# EAGLE board cam (EAGLE 9.6.2), part 1 of 2
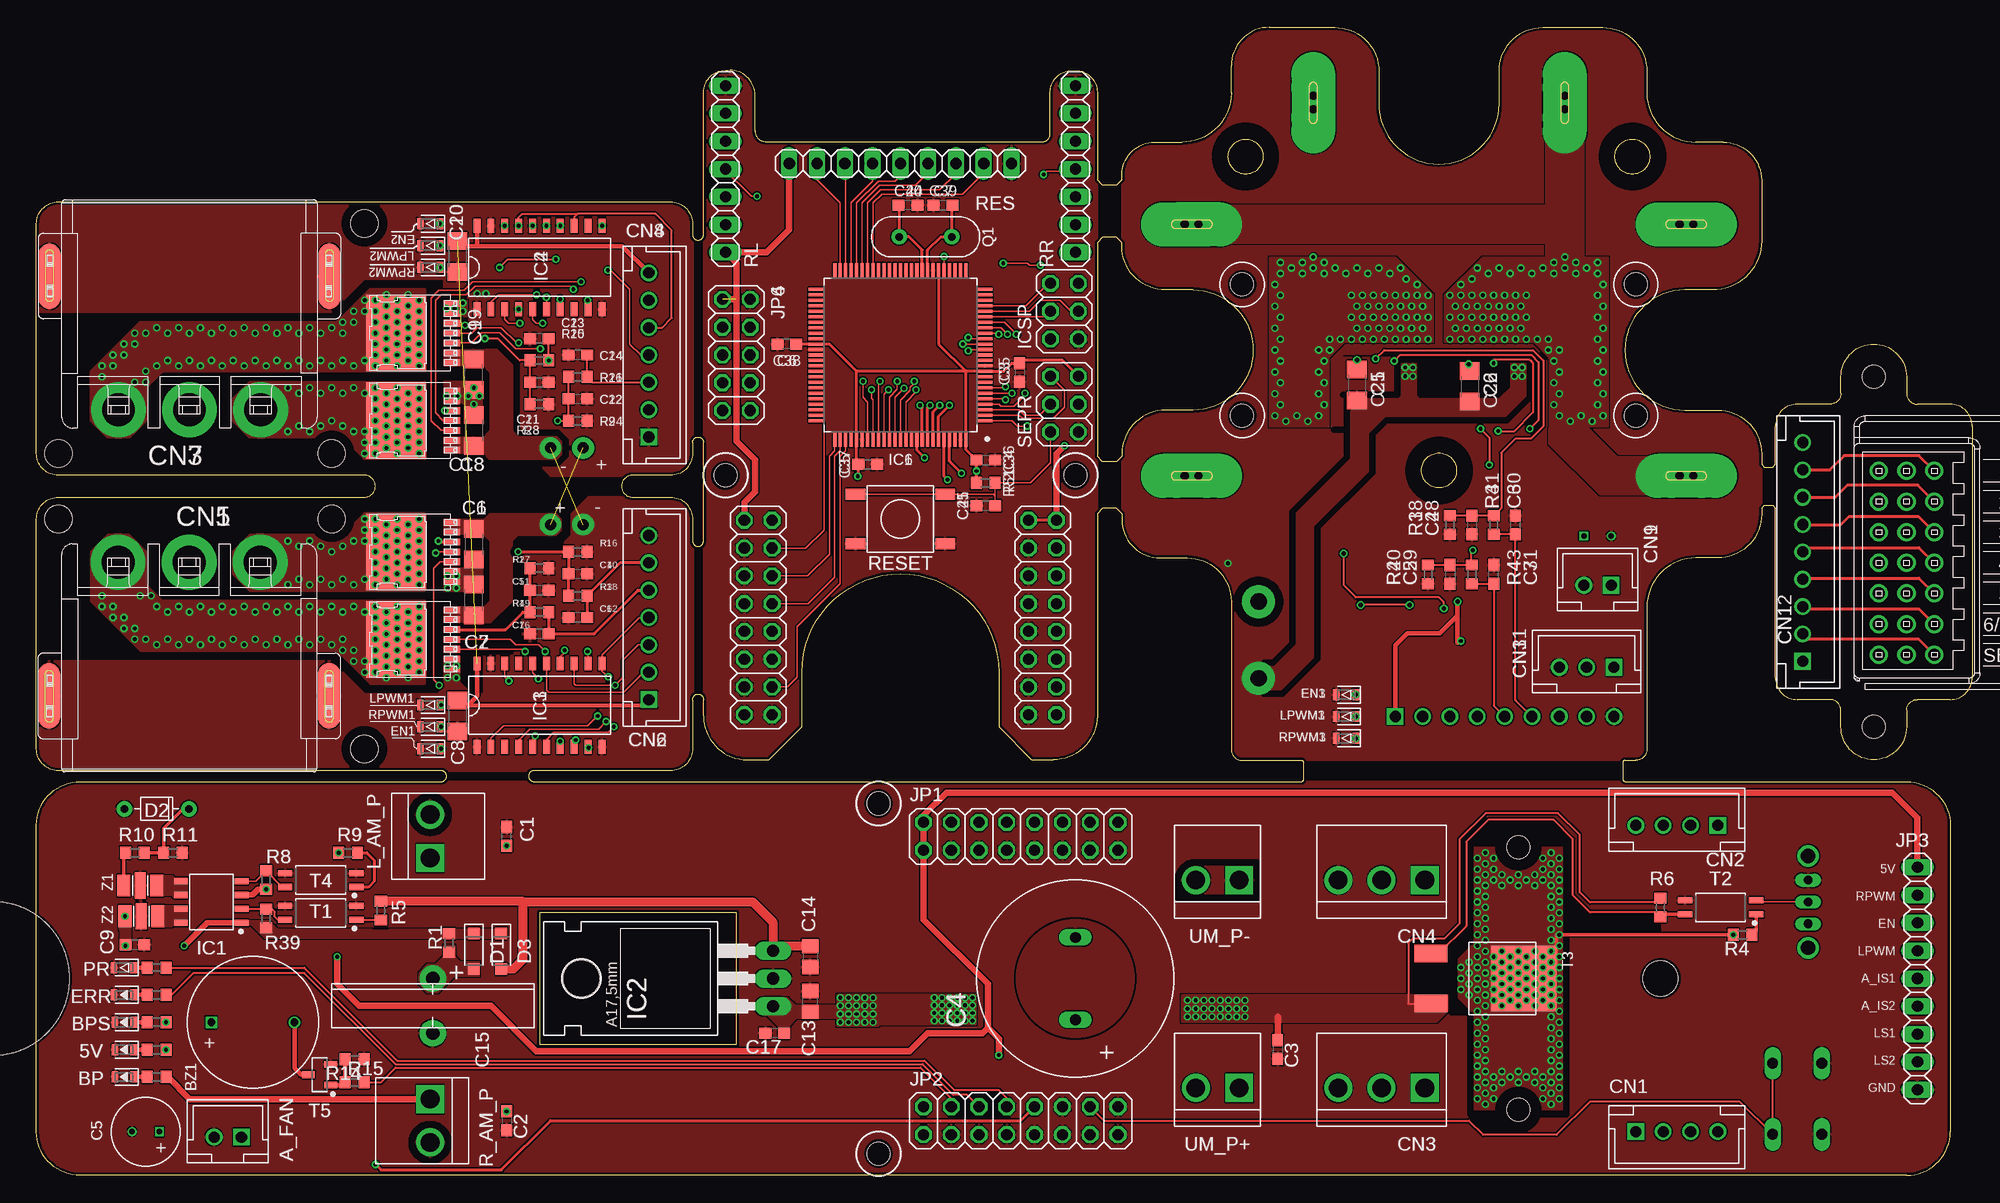
[diagram p0: board, top side]
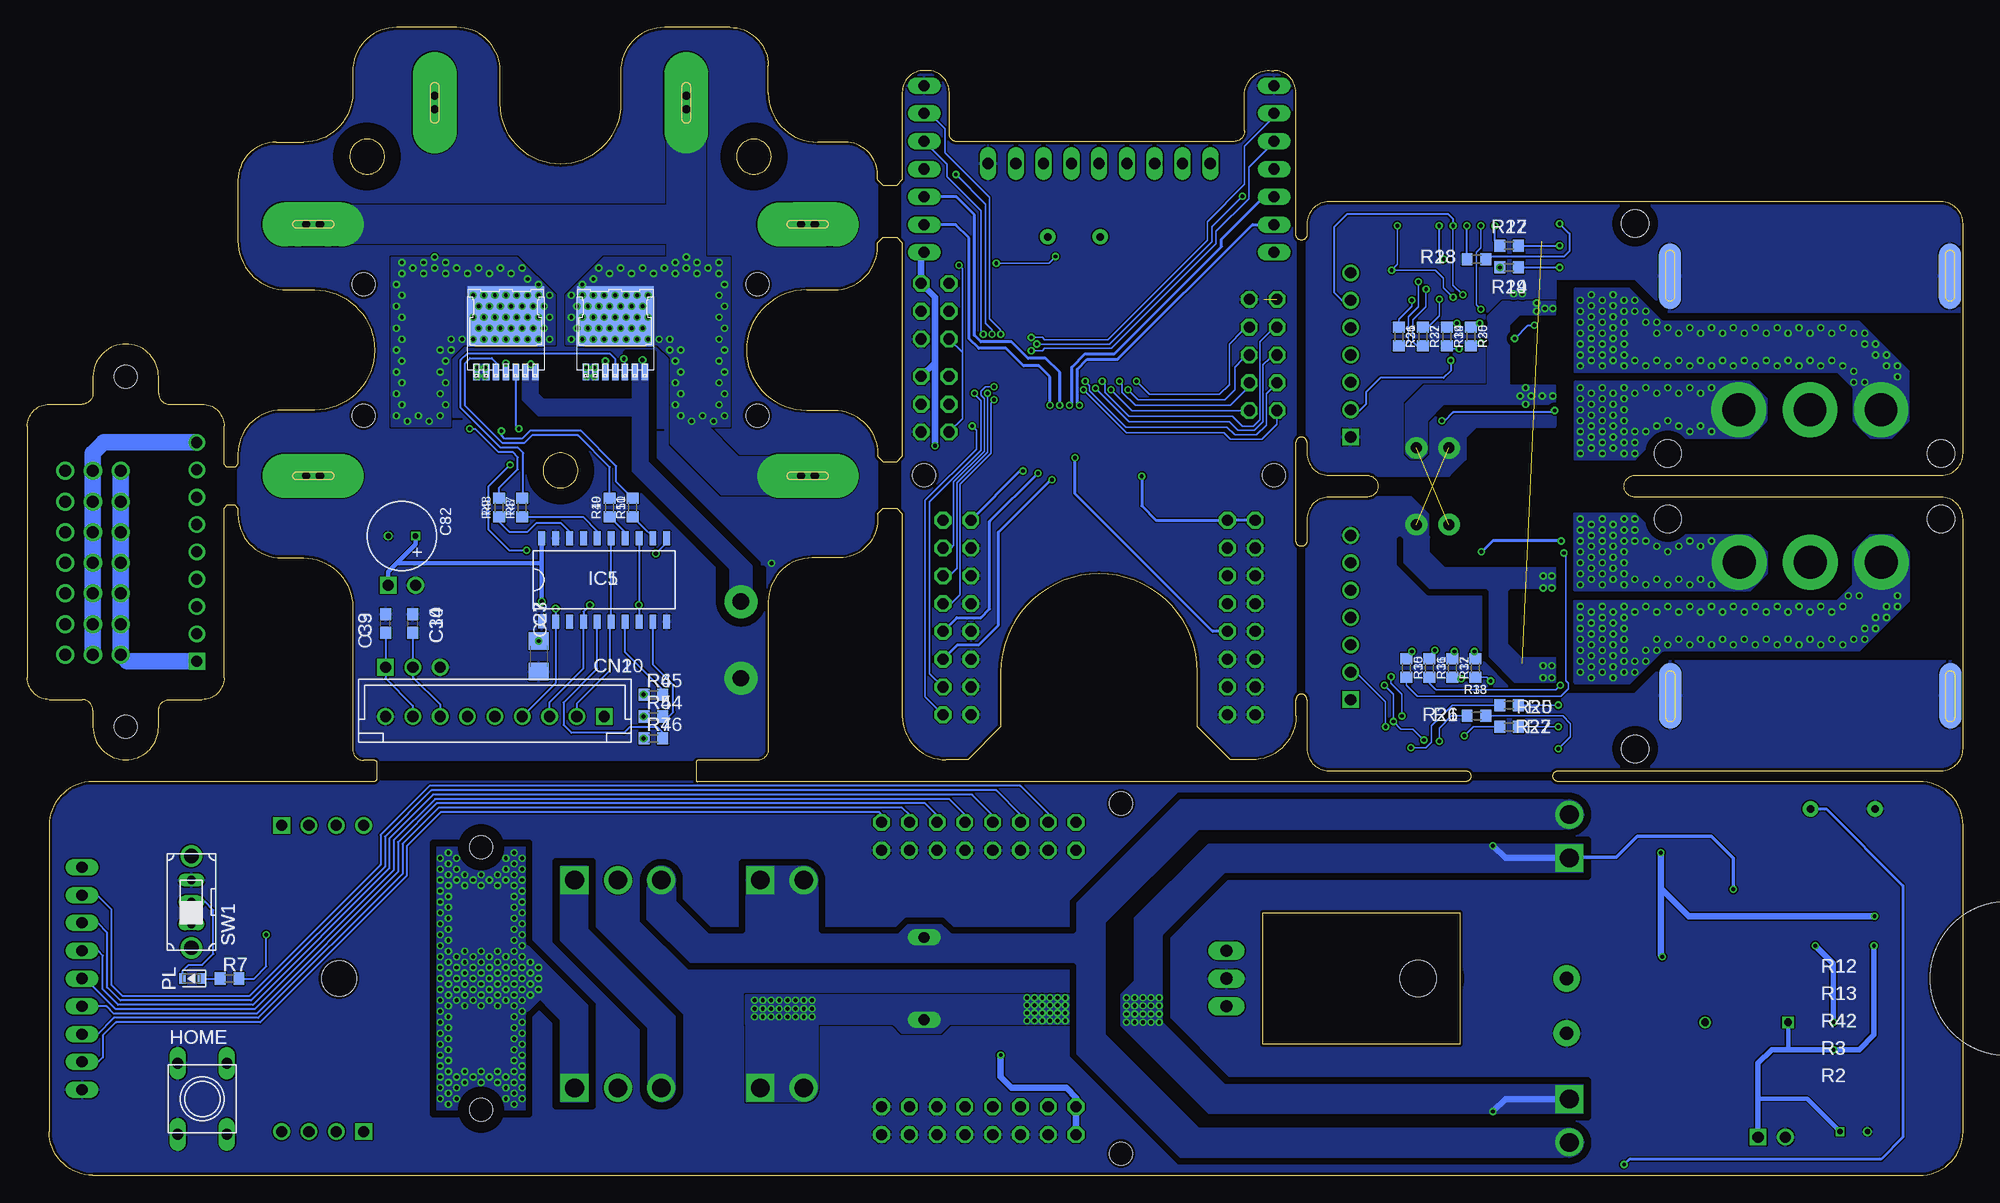
[diagram p1: board, bottom side, seen from below]

Size 177 x 104.95 mm. Coordinates in mm from the lower left corner, seen from the top.
Outline: 0,4 0,32 arc-90 4,36 37,36 arc90 37.5,36.5 arc90 37,37 2,37 arc-90 0,39 0,60 arc-90 2,62 30,62 arc90 31,63 arc90 30,64 2,64 arc-90 0,66 0,87 arc-90 2,89 58,89 arc-90 60,87 60,86 arc90 60.5,85.5 arc90 61,86 61,99 arc-90 63,101 63.2,101 arc-90 65.7,99 65.7,95.5 arc90 66.7,94.5 92,94.5 arc90 92.7,95.2 92.7,99 arc-90 94.7,101 95,101 arc-90 97,99 97,91 97.5,90.5 98.75,90.5 99.25,91 99.25,91.45 arc-90 102.25,94.45 104.75,94.45 arc90 109.25,98.95 109.25,101.45 arc-90 112.75,104.95 118.75,104.95 arc-90 122.75,100.95 122.75,97.95 arc90 128.25,92.45 arc90 133.75,97.95 133.75,100.95 arc-90 137.75,104.95 143.25,104.95 arc-90 147.25,100.95 147.25,98.95 arc90 151.75,94.45 154.25,94.45 arc-90 157.75,90.95 157.75,85.45 arc-90 153.25,80.95 150.75,80.95 arc90 145.25,75.45 arc90 150.75,69.95 153.75,69.95 arc-90 157.75,65.95 157.75,65 158,64.75 158.75,64.75 159,65 159,68.5 arc-90 161,70.5 164,70.5 arc90 165,71.5 165,73 arc-90 168,76 arc-90 171,73 171,71.5 arc90 172,70.5 175,70.5 arc-90 177,68.5 177,45.5 arc-90 175,43.5 172,43.5 arc90 171,42.5 171,41 arc-90 168,38 arc-90 165,41 165,42.5 arc90 164,43.5 161,43.5 arc-90 159,45.5 159,61 158.75,61.25 158,61.25 157.75,61 157.75,60.45 arc-90 153.75,56.45 151.75,56.45 arc90 147.25,51.95 147.25,38.95 arc-90 146.25,37.95 145.25,37.95 arc90 145.05,37.75 145.05,36.25 arc90 145.3,36 171,36 arc-90 175,32 175,4 arc-90 171,0 4,0 arc-90 0,4
Outline: 45.5,36 115.7,36 arc90 115.85,36.15 115.85,37.75 arc90 115.65,37.95 110.25,37.95 arc-90 109.25,38.95 109.25,52.45 arc90 105.25,56.45 102.75,56.45 arc-90 99.25,59.95 99.25,60.5 98.75,61 97.5,61 97,60.5 97,42 arc-90 93,38 91,38 88,41 88,46 arc90 79,55 arc90 70,46 70,41 67,38 65,38 arc-90 61,42 61,43.5 arc90 60.5,44 arc90 60,43.5 60,39 arc-90 58,37 45.5,37 arc90 45,36.5 arc90 45.5,36
Outline: 46,12 64,12 64,24 46,24 46,12
Outline: 58,62 arc-90 60,60 60,58 arc90 60.5,57.5 arc90 61,58 61,67 arc90 60.5,67.5 arc90 60,67 60,66 arc-90 58,64 54.5,64 arc90 53.5,63 arc90 54.5,62 58,62
Outline: 110.57,94.73 arc-90 112.17,93.13 arc-90 110.57,91.53 arc-90 108.97,93.13 arc-90 110.57,94.73
Outline: 128.25,66.05 arc-90 129.85,64.45 arc-90 128.25,62.85 arc-90 126.65,64.45 arc-90 128.25,66.05
Outline: 145.93,94.73 arc-90 147.53,93.13 arc-90 145.93,91.53 arc-90 144.33,93.13 arc-90 145.93,94.73
Outline: 107.15,86.58 arc180 107.15,87.33 104.15,87.33 arc180 104.15,86.58 107.15,86.58
Outline: 117.12,96.55 117.12,99.55 arc180 116.38,99.55 116.38,96.55 arc180 117.12,96.55
Outline: 107.15,63.58 arc90 107.53,63.95 arc90 107.15,64.33 104.15,64.33 arc90 103.78,63.95 arc90 104.15,63.58 107.15,63.58
Outline: 140.12,96.55 140.12,99.55 arc180 139.38,99.55 139.38,96.55 arc180 140.12,96.55
Outline: 152.35,86.58 arc180 152.35,87.33 149.35,87.33 arc180 149.35,86.58 152.35,86.58
Outline: 152.35,63.58 arc90 152.72,63.95 arc90 152.35,64.33 149.35,64.33 arc180 149.35,63.58 152.35,63.58
Outline: 105.75,80.95 arc-90 111.25,75.45 arc-90 105.75,69.95 103.25,69.95 arc90 99.25,65.95 99.25,65.75 98.75,65.25 97.5,65.25 97,65.75 97,85.25 97.5,85.75 98.75,85.75 99.25,85.25 99.25,84.95 arc90 103.25,80.95 105.75,80.95
Copper layers (1*16): Top 0.035mm / dielectric 1.6mm / Bottom 0.035mm
Design rules "JLPCB_2layer": minimum track width 5mil, minimum drill 0.2mm, track to track 5mil, track to pad 5mil, pad to pad 5mil, via to via 5mil, smd to smd 0mil, copper to edge 0.25mm, drill to drill 0.25mm, minimum pad ring 6mil, minimum via ring 6mil, stop-mask expansion 0mil, vias tented up to drill 0.6mm, thermal gap 5mil
Net classes: 1 power: clearance 0.381 mm
Holes 2.1 mm at 135.5,30 135.5,6 77,34 77,2 110.25,69.45 110.25,81.45 146.25,69.45 146.25,81.45 95,64 63,64 168,41 168,73
Holes 14 mm at -4,18
Holes 3.2 mm at 148.5,18
Holes 2.5 mm at 2,60 27,60 30,39 27,66 2,66 30,87
tRestrict: area 133.5,28 to 137.5,32; area 133.5,4 to 137.5,8; area 89.5,12.5 to 100.5,23.5; area 25,58 to 29,62; area 0,58 to 4,62; area 28,37 to 32,41; area 25,64 to 29,68; area 0,64 to 4,68; area 28,85 to 32,89; area 125.2,61.5 to 131.2,67.5; area 107.5,90.2 to 113.5,96.2; area 142.9,90.2 to 148.9,96.2; 78 lines
bRestrict: area 133.5,28 to 137.5,32; area 133.5,4 to 137.5,8; area 25,58 to 29,62; area 0,58 to 4,62; area 28,37 to 32,41; area 25,64 to 29,68; area 0,64 to 4,68; area 28,85 to 32,89; area 125.2,61.5 to 131.2,67.5; area 107.5,90.2 to 113.5,96.2; area 142.9,90.2 to 148.9,96.2; 118 lines

## Footprints (pad centres in the part's own frame; a part is rotated, then mirrored left to right if it is on the bottom)
LEDC1608X39N_B = smd 0.6 x 1: 1 -0.9,0; 2 0.8,0
B2B-XH-A = drill 1.016 square: 1 -1.25,0 | drill 1.016: 2 1.25,0
UGCM1205XP = drill 0.7 square: + -3.8,0 | drill 0.7: - 3.8,0
C0603 = smd 1.1 x 1: 1 -0.85,0; 2 0.85,0
D18_L25_P7.5_D1 = drill 1 long: + -3.75,0; - 3.75,0
CPOL6.3-7_2.5 = drill 0.5 square: + -1.25,0 | drill 0.5: - 1.25,0
C3216 = smd 1.6 x 1.8: 1 -1.4,0; 2 1.4,0
C1608 = smd 1.1 x 1: 1 -0.85,0; 2 0.85,0
C0805 = smd 1.3 x 1.5: 1 -0.95,0; 2 0.95,0
SE-5R5-D105VYV = drill 1.2 pad 2.4: + -2.5,0; - 2.5,0
B4B-XH-A = drill 1.016 square: 1 -3.75,0 | drill 1.016: 2 -1.25,0; 3 1.25,0; 4 3.75,0
B3P-VH = drill 1.7 square: 1 -3.96,0 | drill 1.7: 2 0,0; 3 3.96,0
798-HVH-280-3P-6.5DS = drill 3 pad 5: 1 -6.5,0; 2 0,0; 3 6.5,0 | smd 2 x 6 bottom: P$1 -12.8,12.2; P$2 12.8,12.2 | smd 2 x 6: P$3 -12.8,12.2; P$4 12.8,12.2
B7B-XH-A = drill 1.016 square: 1 -7.5,0 | drill 1.016: 2 -5,0; 3 -2.5,0; 4 0,0; 5 2.5,0; 6 5,0; 7 7.5,0
B9B-XH-A = drill 1.016 square: 1 -10,0 | drill 1.016: 2 -7.5,0; 3 -5,0; 4 -2.5,0; 5 0,0; 6 2.5,0; 7 5,0; 8 7.5,0; 9 10,0
B3B-XH-A = drill 1.016 square: 1 -2.5,0 | drill 1.016: 2 0,0; 3 2.5,0
SOD-123 = smd 1.062 x 1.072: 1 -1.625,0; 2 1.625,0
DIOAD590W50L290D210B = drill 0.7 pad 1.4: 1 -2.95,0; 2 2.95,0
LEDC1608X39N_G = smd 0.6 x 1: A -0.9,0; K 0.9,0
LEDC1608X39N_R = smd 0.6 x 1: 1 -0.9,0; 2 0.9,0
TS-0606-F-N = drill 1 long: T1 -3.25,2.25; T2 3.25,2.25; T3 -3.25,-2.25; T4 3.25,-2.25
SOIC127P600X250-8N = smd 1.261 x 0.552: 1 -2.776,1.905; 2 -2.776,0.635; 3 -2.776,-0.635; 4 -2.776,-1.905; 5 2.776,-1.905; 6 2.776,-0.635; 7 2.776,0.635; 8 2.776,1.905
TO220 = drill 1.118 long: 1 -2.54,-6.35; 2 0,-6.35; 3 2.54,-6.35 | hole 3.302: 0,11.176
SOP20 = smd 0.635 x 1.27: 1 -5.715,-3.8; 2 -4.445,-3.82; 3 -3.175,-3.82; 4 -1.905,-3.82; 5 -0.635,-3.82; 6 0.635,-3.82; 7 1.905,-3.82; 8 3.175,-3.82; 9 4.445,-3.82; 10 5.715,-3.82; 11 5.715,3.8; 12 4.445,3.8; 13 3.175,3.8; 14 1.905,3.8; 15 0.635,3.8; 16 -0.635,3.8; 17 -1.905,3.8; 18 -3.175,3.8; 19 -4.445,3.8; 20 -5.715,3.8
QFP100 = smd 1.312 x 0.28: 1 -7.75,6; 2 -7.75,5.5; 3 -7.75,5; 4 -7.75,4.5; 5 -7.75,4; 6 -7.75,3.5; 7 -7.75,3; 8 -7.75,2.5; 9 -7.75,2; 10 -7.75,1.5; 11 -7.75,1; 12 -7.75,0.5; 13 -7.75,0; 14 -7.75,-0.5; 15 -7.75,-1; 16 -7.75,-1.5; 17 -7.75,-2; 18 -7.75,-2.5; 19 -7.75,-3; 20 -7.75,-3.5; 21 -7.75,-4; 22 -7.75,-4.5; 23 -7.75,-5; 24 -7.75,-5.5; 25 -7.75,-6; 51 7.75,-6; 52 7.75,-5.5; 53 7.75,-5; 54 7.75,-4.5; 55 7.75,-4; 56 7.75,-3.5; 57 7.75,-3; 58 7.75,-2.5; 59 7.75,-2; 60 7.75,-1.5; 61 7.75,-1; 62 7.75,-0.5; 63 7.75,0; 64 7.75,0.5; 65 7.75,1; 66 7.75,1.5; 67 7.75,2; 68 7.75,2.5; 69 7.75,3; 70 7.75,3.5; 71 7.75,4; 72 7.75,4.5; 73 7.75,5; 74 7.75,5.5; 75 7.75,6 | smd 0.28 x 1.312: 26 -6,-7.75; 27 -5.5,-7.75; 28 -5,-7.75; 29 -4.5,-7.75; 30 -4,-7.75; 31 -3.5,-7.75; 32 -3,-7.75; 33 -2.5,-7.75; 34 -2,-7.75; 35 -1.5,-7.75; 36 -1,-7.75; 37 -0.5,-7.75; 38 0,-7.75; 39 0.5,-7.75; 40 1,-7.75; 41 1.5,-7.75; 42 2,-7.75; 43 2.5,-7.75; 44 3,-7.75; 45 3.5,-7.75; 46 4,-7.75; 47 4.5,-7.75; 48 5,-7.75; 49 5.5,-7.75; 50 6,-7.75; 76 6,7.75; 77 5.5,7.75; 78 5,7.75; 79 4.5,7.75; 80 4,7.75; 81 3.5,7.75; 82 3,7.75; 83 2.5,7.75; 84 2,7.75; 85 1.5,7.75; 86 1,7.75; 87 0.5,7.75; 88 0,7.75; 89 -0.5,7.75; 90 -1,7.75; 91 -1.5,7.75; 92 -2,7.75; 93 -2.5,7.75; 94 -3,7.75; 95 -3.5,7.75; 96 -4,7.75; 97 -4.5,7.75; 98 -5,7.75; 99 -5.5,7.75; 100 -6,7.75
2X03 = drill 1.016 octagon: 1 -2.54,-1.27; 2 -2.54,1.27; 3 0,-1.27; 4 0,1.27; 5 2.54,-1.27; 6 2.54,1.27
2X08 = drill 1.016 octagon: 1 -8.89,-1.27; 2 -8.89,1.27; 3 -6.35,-1.27; 4 -6.35,1.27; 5 -3.81,-1.27; 6 -3.81,1.27; 7 -1.27,-1.27; 8 -1.27,1.27; 9 1.27,-1.27; 10 1.27,1.27; 11 3.81,-1.27; 12 3.81,1.27; 13 6.35,-1.27; 14 6.35,1.27; 15 8.89,-1.27; 16 8.89,1.27
1X09 = drill 1.016 long: 1 -10.16,0; 2 -7.62,0; 3 -5.08,0; 4 -2.54,0; 5 0,0; 6 2.54,0; 7 5.08,0; 8 7.62,0; 9 10.16,0
2X05 = drill 1.016 octagon: 1 -5.08,-1.27; 2 -5.08,1.27; 3 -2.54,-1.27; 4 -2.54,1.27; 5 0,-1.27; 6 0,1.27; 7 2.54,-1.27; 8 2.54,1.27; 9 5.08,-1.27; 10 5.08,1.27
B2P-VH = drill 1.7 square: 1 -1.98,0 | drill 1.7: 2 1.98,0
VIA_2X5.25_D0.75 = drill 0.75 pad 4 long: P$1 0,0
XTALRR480W50L990T368H350B = drill 0.7 pad 1.4: 1 -2.4,0; 2 2.4,0
R0603 = smd 1 x 1.1: 1 -0.85,0; 2 0.85,0
R1608 = smd 1 x 1.1: 1 -0.85,0; 2 0.85,0
TS-06104 = smd 1.8 x 1: A1 -4.1,2.25; A2 4.1,2.25; B1 -4.1,-2.25; B2 4.1,-2.25
1X07 = drill 1.016 long: 1 -7.62,0; 2 -5.08,0; 3 -2.54,0; 4 0,0; 5 2.54,0; 6 5.08,0; 7 7.62,0
SS-12D01-VG4 = drill 0.8 long: COM 0,0; NC -2,0; NO 2,0 | drill 1.3: P$4 -4.2,0; P$5 4.2,0
SOIC127P700X210-4N = smd 1.312 x 0.552: 1 -3.25,0.635; 2 -3.25,-0.635; 3 3.25,-0.635; 4 3.25,0.635
DPACK = smd 1.6 x 3: 1 -2.3,-3.5; 3 2.3,-3.5 | smd 6 x 6: 2 0,5
SOT95P240X110-3N = smd 1.18 x 0.609: 1 -1.024,0.95; 2 -1.024,-0.95; 3 1.024,0
BTN9990LV = smd 0.6 x 1.5: GND1 -2.7,-3.5; GND2 -1.8,-3.5; IN -0.9,-3.5; INH 0,-3.5; IS 0.9,-3.5; VS1 1.8,-3.5; VS2 2.7,-3.5 | smd 7 x 5.5: OUT 0,1.6
R3006B = drill 1.1: 0B 2.54,8.4; 1 -2.54,-8.4; 01 2.54,-8.4; 2 -2.54,-5.6; 02 2.54,-5.6; 3 -2.54,-2.8; 03 2.54,-2.8; 4 -2.54,0; 04 2.54,0; 5 -2.54,2.8; 05 2.54,2.8; 6 -2.54,5.6; 06 2.54,5.6; B -2.54,8.4; V1 0,-8.4; V2 0,-5.6; V3 0,-2.8; V4 0,0; V5 0,2.8; V6 0,5.6; VB 0,8.4
NFE31 = smd 1.2 x 2: 1 -1.5,0; 3 1.5,0 | smd 1 x 2.4: 2 0,0

## Placement (x,y rotation side)
5V  OSBL1608C1A  [LEDC1608X39N_B]  8,11.5 180 top
A_FAN  [B2B-XH-A]  17.5,3.5 180 top
BP  OSBL1608C1A  [LEDC1608X39N_B]  8,9 180 top
BPS  OSBL1608C1A  [LEDC1608X39N_B]  8,14 180 top
BZ1  UGCM1205XP  [UGCM1205XP]  19.8,14 0 top
C1  0.1u  [C0603]  43,31 90 top
C2  0.1u  [C0603]  43,5 270 top
C3  0.1u  [C0603]  113.5,11.5 270 top
C4  3300u  [D18_L25_P7.5_D1]  95,18 90 top
C5  100u  [CPOL6.3-7_2.5]  10,4 180 top
C6  10u  [C3216]  40,57.7 270 top
C7  10u  [C3216]  40,52.6 90 top
C8  10u  [C3216]  38.5,42 270 top
C9  0.1u  [C0603]  9,21.1 0 top
C10  1n  [C1608]  49.5,55 0 top
C11  1n  [C1608]  46,53.5 0 top
C12  0.1u  [C1608]  49.5,51 180 top
C13  10u  [C0805]  70.75,15.9 90 top
C14  10u  [C0805]  70.75,20 270 top
C15  SE-5R5-D105VYV  [SE-5R5-D105VYV]  36.25,15.5 270 top
C16  0.1u  [C1608]  46,49.5 180 top
C17  0.1u  [C0603]  67.5,13 180 top
C18  10u  [C3216]  40,68.1 270 top
C19  10u  [C3216]  40,73.2 90 top
C20  10u  [C3216]  38.5,84 270 top
C21  1n  [C1608]  46,72.5 0 top
C22  1n  [C1608]  49.5,71 0 top
C23  0.1u  [C1608]  46,76.5 180 top
C24  0.1u  [C1608]  49.5,75 180 top
C25  10u  [C3216]  120.75,72.25 270 top
C26  10u  [C3216]  131.05,72.15 270 top
C27  10u  [C3216]  130.25,47.45 270 bottom
C28  1n  [C1608]  131.25,59.45 270 top
C29  1n  [C1608]  129.25,54.95 270 top
C30  0.1u  [C1608]  135.25,59.45 90 top
C31  0.1u  [C1608]  133.25,54.95 90 top
C32  100u  [CPOL6.3-7_2.5]  142.75,58.45 180 bottom
C33  1n  [C1608]  144.25,50.45 90 bottom
C34  1n  [C1608]  141.75,50.45 90 bottom
C35  0.1u  [C0603]  89.9,73.4 270 top
C36  0.1u  [C0603]  86.8,65.4 0 top
C37  0.1u  [C0603]  76,65 0 top
C38  0.1u  [C0603]  68.6,76 180 top
C39  22p  [C0603]  82.9,88.7 0 top
C40  22p  [C0603]  79.7,88.7 180 top
C41  22p  [C0603]  86.8,61.2 180 top
CN1  [B4B-XH-A]  150,4 0 top
CN2  [B4B-XH-A]  150,32 180 top
CN3  [B3P-VH]  123,8 180 top
CN4  [B3P-VH]  123,27 180 top
CN5  798-HVH-280-3P-6.5DS  [798-HVH-280-3P-6.5DS]  13.97,56.05 180 top
CN6  [B7B-XH-A]  56,51 90 top
CN7  798-HVH-280-3P-6.5DS  [798-HVH-280-3P-6.5DS]  14,70 0 top
CN8  [B7B-XH-A]  56,75 90 top
CN9  [B2B-XH-A]  142.75,53.95 180 top
CN10  [B9B-XH-A]  134.25,41.95 180 bottom
CN11  [B3B-XH-A]  141.75,46.45 180 top
CN12  [B9B-XH-A]  161.5,57 90 top
D1  SS2040FL  [SOD-123]  40,20.5 270 top
D2  GDZJ5.1ADO-34  [DIOAD590W50L290D210B]  11,33.5 180 top
D3  SS2040FL  [SOD-123]  42.5,20.5 270 top
EN1  OSTG1608C1A  [LEDC1608X39N_G]  36,39 180 top
EN2  OSTG1608C1A  [LEDC1608X39N_G]  36,87 180 top
EN3  OSTG1608C1A  [LEDC1608X39N_G]  119.75,43.95 180 top
ERR  OSHR1608C1A  [LEDC1608X39N_R]  8,16.5 180 top
HOME  TS-0606-F-N-BLK  [TS-0606-F-N]  161,7 270 bottom
IC1  FDS4935A  [SOIC127P600X250-8N]  16,25 180 top
IC2  NJM7805FA-I  [TO220]  61,18 90 top
IC3  TC74HC244AF  [SOP20]  46,43 0 top
IC4  TC74HC244AF  [SOP20]  46,83 0 top
IC5  TC74HC244AF  [SOP20]  124.25,54.45 0 bottom
IC6  ATMEGA2560-16AU  [QFP100]  79,75 180 top
ICSP  [2X03]  94,79 270 top
JP1  [2X08]  90,31 0 top
JP2  [2X08]  90,5 0 top
JP3  [1X09]  172,18 270 top
JP4  [2X08]  92,51 270 top
JP5  [2X08]  66,51 270 top
JP6  [2X05]  64,75 270 top
L_AM_P  [B2P-VH]  36,31 90 top
LPWM1  OSTG1608C1A  [LEDC1608X39N_G]  36,43 180 top
LPWM2  OSTG1608C1A  [LEDC1608X39N_G]  36,83 180 top
LPWM3  OSTG1608C1A  [LEDC1608X39N_G]  119.75,41.95 180 top
OUT1  VIA_2.5X5.25_D0.75  [VIA_2X5.25_D0.75]  106.25,63.95 90 top
PL  OSBL1608C1A  [LEDC1608X39N_B]  162,18 180 bottom
PR  OSTG1608C1A  [LEDC1608X39N_G]  8,19 180 top
Q1  HUSG-16.000-20  [XTALRR480W50L990T368H350B]  81.3,85.8 0 top
R1  10  [R0603]  37.75,21.25 90 top
R2  1k  [R0603]  11,9 0 top
R3  1k  [R0603]  11,11.5 0 top
R4  480  [R0603]  156,22 180 top
R5  100  [R0603]  31.5,24.2 270 top
R6  10k  [R0603]  148.5,24.5 270 top
R7  1k  [R0603]  158.5,18 0 bottom
R8  10k  [R0603]  21,27 270 top
R9  100  [R0603]  28.5,29.5 180 top
R10  4.7k  [R0603]  9,29.5 180 top
R11  1k  [R0603]  12.5,29.5 180 top
R12  1k  [R0603]  11,19 0 top
R13  1k  [R0603]  11,16.5 0 top
R14  1k  [R0603]  29.1,10.6 180 top
R15  10  [R0603]  29.1,8.5 0 top
R16  1.5k  [R0603]  49.5,57 180 top
R17  1.5k  [R0603]  46,55.5 180 top
R18  150  [R0603]  49.5,53 180 top
R19  150  [R0603]  46,51.5 180 top
R20  1k  [R0603]  41.5,43 180 bottom
R21  1k  [R0603]  44.5,42 180 bottom
R22  1k  [R0603]  41.5,41 180 bottom
R23  1.5k  [R0603]  46,70.5 180 top
R24  1.5k  [R0603]  49.5,69 180 top
R25  150  [R0603]  46,74.5 180 top
R26  150  [R0603]  49.5,73 180 top
R27  1k  [R0603]  41.5,85 180 bottom
R28  1k  [R0603]  44.5,83.75 180 bottom
R29  1k  [R0603]  41.5,83 180 bottom
R30  10k  [R1608]  50.9,46.4 270 bottom
R31  10k  [R1608]  48.8,46.4 270 bottom
R32  10k  [R1608]  46.7,46.4 90 bottom
R33  10k  [R1608]  44.6,46.4 90 bottom
R34  10k  [R1608]  47.2,76.7 270 bottom
R35  10k  [R1608]  45,76.7 270 bottom
R36  10k  [R1608]  51.6,76.7 270 bottom
R37  10k  [R1608]  49.4,76.7 270 bottom
R38  1.5k  [R0603]  129.25,59.45 90 top
R39  10k  [R0603]  21,23.5 270 top
R40  1.5k  [R0603]  127.25,54.95 90 top
R41  150  [R0603]  133.25,59.45 90 top
R42  1k  [R0603]  11,14 0 top
R43  150  [R0603]  131.25,54.95 90 top
R44  1k  [R0603]  119.75,41.95 0 bottom
R45  1k  [R0603]  119.75,43.95 0 bottom
R46  1k  [R0603]  119.75,39.95 0 bottom
R47  10k  [R1608]  131.75,61.05 90 bottom
R48  10k  [R1608]  133.85,61.05 90 bottom
R49  10k  [R1608]  123.75,61.05 90 bottom
R50  10k  [R1608]  121.65,61.05 90 bottom
R51  10k  [R0603]  86.8,63.3 180 top
R_AM_P  [B2P-VH]  36,5 270 top
RES  [1X09]  79,92.5 0 top
RESET  TS-06104  [TS-06104]  79,60 0 top
RL  [1X07]  63,92 90 top
RPWM1  OSTG1608C1A  [LEDC1608X39N_G]  36,41 180 top
RPWM2  OSTG1608C1A  [LEDC1608X39N_G]  36,85 180 top
RPWM3  OSTG1608C1A  [LEDC1608X39N_G]  119.75,39.95 180 top
RR  [1X07]  95,92 90 top
SEPR  [2X03]  94,70.5 270 top
SW1  SS-12D01-VG4  [SS-12D01-VG4]  162,25 90 bottom
T1  TLP291  [SOIC127P700X210-4N]  26,24 180 top
T2  TLP291  [SOIC127P700X210-4N]  154,24.5 180 top
T3  TJ60S04M3L  [DPACK]  131,18 270 top
T4  TLP291  [SOIC127P700X210-4N]  26,27 180 top
T5  IRLML6344TRPBF  [SOT95P240X110-3N]  25.9,9.2 180 top
U1  BTN9990LV  [BTN9990LV]  34.5,57 90 top
U2  BTN9990LV  [BTN9990LV]  34.5,49 90 top
U3  BTN9990LV  [BTN9990LV]  34.5,77 90 top
U4  BTN9990LV  [BTN9990LV]  34.5,69 90 top
U5  BTN9990LV  [BTN9990LV]  123.25,76.95 0 bottom
U6  BTN9990LV  [BTN9990LV]  133.25,76.95 0 bottom
U$1  R3006B  [R3006B]  171,56 180 top
U$2  VIA_2.5X5.25_D0.75  [VIA_2X5.25_D0.75]  105,63.95 90 top
U$4  VIA_2.5X5.25_D0.75  [VIA_2X5.25_D0.75]  116.75,97.45 180 top
U$5  VIA_2.5X5.25_D0.75  [VIA_2X5.25_D0.75]  116.75,98.7 180 top
U$6  VIA_2.5X5.25_D0.75  [VIA_2X5.25_D0.75]  150.25,86.95 270 top
U$7  VIA_2.5X5.25_D0.75  [VIA_2X5.25_D0.75]  151.5,86.95 270 top
U$8  VIA_2.5X5.25_D0.75  [VIA_2X5.25_D0.75]  139.75,97.45 180 top
U$9  VIA_2.5X5.25_D0.75  [VIA_2X5.25_D0.75]  151.5,63.95 90 top
U$10  VIA_2.5X5.25_D0.75  [VIA_2X5.25_D0.75]  150.25,63.95 90 top
U$11  VIA_2.5X5.25_D0.75  [VIA_2X5.25_D0.75]  106.25,86.95 90 top
U$12  VIA_2.5X5.25_D0.75  [VIA_2X5.25_D0.75]  139.75,98.7 180 top
U$13  VIA_2.5X5.25_D0.75  [VIA_2X5.25_D0.75]  105,86.95 270 top
UM_P+  [B2P-VH]  108,8 180 top
UM_P-  [B2P-VH]  108,27 180 top
Z1  NFE31PT  [NFE31]  9.5,26.5 180 top
Z2  NFE31PT  [NFE31]  9.6,23.7 180 top

## Library data of the parts
5V BP BPS EN1-EN3 ERR LPWM1-LPWM3 PL PR RPWM1-RPWM3 = LED
A_FAN CN1 CN2 CN6 CN8-CN12 = jst-xh
BZ1 = UGCM1205XP
C1-C3 C9 C13 C14 C17 C35-C41 = rcl; SPICEPREFIX: C
C4 = 小形アルミニウム電解コンデンサ_WXAシリーズ
C5 C32 = 小形アルミニウム電解コンデンサ_MH7シリーズ
C6-C8 C18-C20 C25-C27 = 村田製作所_チップセラミックコンデンサ; 01_CLASS: チップセラミックコンデンサ; 02_BENDER: DigiKey; 03_MAKER: ㈱村田製作所; 04_CHARA: 50V X7T ±10%; 05_COST: 245222; 06_QTY: 6000; 10_DIGIKEY_CODE: 490-GCM31CD71H106KE36KDKR-ND
C10 C11 C21 C22 C28 C29 C33 C34 = 村田製作所_チップセラミックコンデンサ; 01_CLASS: チップセラミックコンデンサ; 02_BENDER: DigiKey; 03_MAKER: ㈱村田製作所; 04_CHARA: 50V X8R ±10%; 05_COST: 13782; 06_QTY: 4000; 10_DIGIKEY_CODE: 490-14360-2-ND
C12 C16 C23 C24 C30 C31 = 村田製作所_チップセラミックコンデンサ; 01_CLASS: チップセラミックコンデンサ; 02_BENDER: DigiKey; 03_MAKER: ㈱村田製作所; 04_CHARA: 50V X8L ±10%; 05_COST: 14655; 06_QTY: 4000; 10_DIGIKEY_CODE: 490-6049-6-ND
C15 = スーパーキャパシタ
CN3 CN4 L_AM_P R_AM_P UM_P+ UM_P- = jst-vh
CN5 CN7 = HVH-280
D1 D3 = PI_ダイオード
D2 = ダイオード
HOME RESET = タクトスイッチ
IC1 T5 = FET
IC2 = 正三端子レギュレータ
IC3-IC5 = 東芝_74LSシリーズ
IC6 = atmega
ICSP JP1-JP6 RES RL RR SEPR = pinhead
OUT1 U$2 U$4-U$13 = ビア・パッド
Q1 = 水晶振動子
R1-R29 R38-R46 R51 = rcl; SPICEPREFIX: R
R30-R37 R47-R50 = FLE_抵抗器; 01_CLASS: チップ抵抗; 02_BENDER: 秋月電子通商; 03_MAKER: FAITHFUL LINK INDUSTRIAL CORP.; 04_CHARA: 1/10W ±5%; 05_COST: 980; 06_QTY: 5000; 10_AKIZUKI_CODE: R-15029
SW1 = スライドスイッチ
T1 T2 T4 = フォトカプラ
T3 = 東芝_PchMOSFET
U1-U6 = IT_MotorControlIC
U$1 = レシーバ
Z1 Z2 = EMIフィルタ

## Nets
5V: CN12.9 U$1.V1 U$1.V2 U$1.V3 U$1.V4 U$1.V5 U$1.V6 U$1.VB
5V1 [power]: IC1.7 IC1.8 Z2.1
+5V: A_FAN.1 BZ1.+ C5.+ C9.1 JP1.1 JP1.2 JP2.1 JP2.2 JP3.1 R3.2 R9.2 Z2.3
+5V1: C35.1 C36.1 C37.1 C38.1 IC6.10 IC6.31 IC6.61 IC6.80 IC6.100 ICSP.2 JP4.1 JP4.2 JP5.1 JP5.2 JP6.1 R51.2 RES.1 RL.1 RR.1 SEPR.2
+18V [power]: CN3.1 R4.2 R7.2 T3.2
A_DIR: IC6.5 JP4.8
A_EN: IC6.6 JP4.6
A_IS1: JP1.10 JP3.5
A_IS2: JP1.12 JP3.6
A_IS3: IC6.97 JP4.10
A_IS4: IC6.96 JP4.12
A_PWM: IC6.7 JP4.4
BLINE2 [power]: CN3.3 CN4.1
BPS_LINE [power]: D1.1 D3.1 IC1.1 R1.2 R39.2 R42.2
BPS_OR [power]: C15.+ D1.2 R1.1
BUZ: JP2.4 R15.2
BUZ1: IC6.75 JP5.4
EN: JP1.6 JP3.3
EN1: CN6.3 IC3.4 IC3.8 IC3.13
EN2: CN8.5 IC4.4 IC4.13 IC4.17
EN3: CN10.3 IC5.4 IC5.8 IC5.13
ERR_LED: JP2.6 R13.2
ERR_LED1: IC6.76 JP5.6
GND: 5V.2 A_FAN.2 BP.2 BPS.2 C1.2 C2.2 C3.2 C4.- C5.- C9.2 C13.2 C14.2 C15.- C17.2 CN4.3 D2.2 ERR.2 HOME.T3 HOME.T4 IC2.2 JP1.3 JP1.5 JP1.7 JP1.9 JP1.11 JP1.13 JP1.15 JP2.3 JP2.5 JP2.7 JP2.9 JP2.11 JP2.12 JP2.13 JP2.15 JP2.16 JP3.9 L_AM_P.2 PR.K R11.1 R14.1 R_AM_P.2 SW1.NO T1.2 T1.3 T2.3 T4.2 T4.3 T5.2 UM_P-.1 UM_P-.2 Z1.2 Z2.2
GND1: C6.2 C7.2 C8.2 C10.2 C11.2 C12.2 C16.2 C18.2 C19.2 C20.2 C21.2 C22.2 C23.2 C24.2 CN5.P$1 CN5.P$2 CN5.P$3 CN5.P$4 CN6.7 CN7.P$1 CN7.P$2 CN7.P$3 CN7.P$4 CN8.1 EN1.K EN2.K IC3.1 IC3.10 IC3.19 IC4.1 IC4.10 IC4.19 LPWM1.K LPWM2.K R16.1 R17.1 R23.1 R24.1 RPWM1.K RPWM2.K U1.GND1 U1.GND2 U2.GND1 U2.GND2 U3.GND1 U3.GND2 U4.GND1 U4.GND2
GND2: C25.2 C26.2 C27.2 C28.2 C29.2 C30.2 C31.2 C32.- C33.2 C34.2 CN9.2 CN10.9 CN11.3 EN3.K IC5.1 IC5.10 IC5.19 LPWM3.K R38.1 R40.1 RPWM3.K U5.GND1 U5.GND2 U6.GND1 U6.GND2
GND3: C35.2 C36.2 C37.2 C38.2 C39.1 C40.1 C41.2 IC6.11 IC6.32 IC6.62 IC6.81 IC6.99 ICSP.6 JP4.3 JP4.5 JP4.7 JP4.9 JP4.11 JP4.13 JP4.15 JP5.3 JP5.5 JP5.7 JP5.9 JP5.11 JP5.12 JP5.13 JP5.15 JP5.16 JP6.2 RES.9 RESET.B1 RESET.B2 RL.7 RR.7 SEPR.6
GND4: CN12.1 U$1.0B U$1.01 U$1.02 U$1.03 U$1.04 U$1.05 U$1.06
HOME_SW: HOME.T1 HOME.T2 JP2.14
HOME_SW1: IC6.78 JP5.14
IS1: C12.1 CN6.6 R18.1
IS1_A: C10.1 R16.2 R18.2 U1.IS
IS1_A1: C21.1 R23.2 R25.2 U3.IS
IS1_A2: C28.1 R38.2 R41.2 U5.IS
IS2: C16.1 CN6.5 R19.1
IS2_1: C11.1 R17.2 R19.2 U2.IS
IS2_2: C22.1 R24.2 R26.2 U4.IS
IS2_3: C29.1 R40.2 R43.2 U6.IS
IS3: C30.1 CN10.6 R41.1
IS4: C31.1 CN10.5 R43.1
IS12: C23.1 CN8.2 R25.1
IS22: C24.1 CN8.3 R26.1
LPWM: JP1.8 JP3.4
LPWM1: CN6.4 IC3.2 IC3.11
LPWM2: CN8.4 IC4.6 IC4.11
LPWM3: CN10.4 IC5.2 IC5.11
LS1: JP1.14 JP3.7
LS2: JP1.16 JP3.8
LS3: C33.1 CN10.8 CN11.1
LS4: C34.1 CN10.7 CN11.2
LS5: IC6.4 JP4.14
LS6: IC6.1 JP4.16
MISO: IC6.22 ICSP.1
MOSI: IC6.21 ICSP.4
N$1: PL.1 R7.1
N$2: BP.1 R2.1
N$3: 5V.1 R3.1
N$4: IC1.5 IC1.6 Z1.1
N$5 [power]: C14.1 D3.2 IC2.3 R5.1
N$6: R4.1 T2.1
N$7: PL.2 SW1.COM T2.2
N$8: R6.2 T2.4 T3.1
N$9: IC1.4 R8.1 T4.4
N$10: PR.A R12.1
N$11: R9.1 T4.1
N$12: R10.2 Z1.3
N$13: IC1.2 R39.1 T1.4
N$14: ERR.1 R13.1
N$15: BZ1.- T5.3
N$16: R14.2 R15.1 T5.1
N$17: R5.2 T1.1
N$18: IC3.18 R33.1
N$19: IC3.16 R32.1
N$20: IC3.14 R31.1
N$21: IC3.12 R30.1
N$22: LPWM1.A R20.1
N$23: EN1.A R21.1
N$24: R22.1 RPWM1.A
N$25: IC3.9 R20.2
N$26: IC3.7 R21.2
N$27: IC3.5 R22.2
N$28: IC4.9 R36.1
N$29: IC4.7 R37.1
N$30: IC4.5 R34.1
N$31: IC4.3 R35.1
N$32: R27.1 RPWM2.A
N$33: EN2.A R28.1
N$34: LPWM2.A R29.1
N$35: IC4.18 R27.2
N$36: IC4.16 R28.2
N$37: IC4.14 R29.2
N$38: R30.2 U1.INH
N$39: R31.2 U1.IN
N$40: R32.2 U2.INH
N$41: R33.2 U2.IN
N$42: R34.2 U3.IN
N$43: R35.2 U3.INH
N$44: R36.2 U4.IN
N$45: R37.2 U4.INH
N$46: IC5.18 R48.1
N$47: BPS.1 R42.1
N$48: IC5.16 R47.1
N$49: LPWM3.A R44.1
N$50: EN3.A R45.1
N$51: R46.1 RPWM3.A
N$52: IC5.9 R44.2
N$53: IC5.7 R45.2
N$54: IC5.5 R46.2
N$55: IC5.14 R49.1
N$56: IC5.12 R50.1
N$57: R47.2 U5.INH
N$58: R48.2 U5.IN
N$59: R49.2 U6.IN
N$60: R50.2 U6.INH
N$61: C40.2 IC6.34 Q1.1
N$62: C39.2 IC6.33 Q1.2
N$63: IC6.43 RES.8
N$64: IC6.44 RES.7
N$65: IC6.45 RES.6
N$66: IC6.46 RES.5
N$67: IC6.47 RES.4
N$68: IC6.48 RES.3
N$69: IC6.49 RES.2
N$70: IC6.89 JP6.9
N$71: IC6.88 JP6.7
N$72: IC6.87 JP6.5
N$73: IC6.86 JP6.3
N$74: IC6.85 JP6.10
N$75: IC6.84 JP6.8
N$76: IC6.83 JP6.6
N$77: IC6.82 JP6.4
N$78: CN12.8 U$1.1
N$79: CN12.7 U$1.2
N$80: CN12.6 U$1.3
N$81: CN12.5 U$1.4
N$82: CN12.4 U$1.5
N$83: CN12.3 U$1.6
N$84: CN12.2 U$1.B
OUT1 [power]: CN5.1 U1.OUT
OUT2 [power]: CN5.3 U2.OUT
OUT3 [power]: CN7.1 U3.OUT
OUT4 [power]: CN7.3 U4.OUT
OUT5 [power]: OUT1.P$1 U5.OUT U$2.P$1 U$4.P$1 U$5.P$1 U$6.P$1 U$7.P$1
OUT6 [power]: U6.OUT U$8.P$1 U$9.P$1 U$10.P$1 U$11.P$1 U$12.P$1 U$13.P$1
PR_LED: JP2.8 R12.2
PR_LED1: IC6.77 JP5.8
PW_AD: D2.1 JP2.10 R10.1 R11.2
PW_AD1: IC6.91 JP5.10
RESET: C41.1 IC6.30 ICSP.5 R51.1 RESET.A1 RESET.A2 SEPR.5
RL_DIR: IC6.16 RL.6
RL_EN: IC6.14 RL.5
RL_IS1: IC6.92 RL.2
RL_IS2: IC6.93 RL.3
RL_PWM: IC6.15 RL.4
RPWM: JP1.4 JP3.2
RPWM1: CN6.2 IC3.6 IC3.15
RPWM2: CN8.6 IC4.2 IC4.15
RPWM3: CN10.2 IC5.6 IC5.15
RR_DIR: IC6.17 RR.6
RR_EN: IC6.19 RR.5
RR_IS1: IC6.95 RR.2
RR_IS2: IC6.94 RR.3
RR_PWM: IC6.18 RR.4
RX1: IC6.2 SEPR.1
SCK: IC6.20 ICSP.3
TX1: IC6.3 SEPR.3
VCC: C8.1 C20.1 CN6.1 CN8.7 IC3.20 IC4.20
VCC1: C27.1 C32.+ CN9.1 CN10.1 IC5.20
VDD [power]: C1.1 C2.1 C3.1 C4.+ C13.1 C17.1 IC1.3 IC2.1 L_AM_P.1 R2.2 R6.1 R8.2 R_AM_P.1 T3.3 UM_P+.1 UM_P+.2
VDD1 [power]: C6.1 C7.1 C18.1 C19.1 U1.VS1 U1.VS2 U2.VS1 U2.VS2 U3.VS1 U3.VS2 U4.VS1 U4.VS2
VDD2: C25.1 C26.1 U5.VS1 U5.VS2 U6.VS1 U6.VS2